# EAGLE board large_sense_pcb_b (EAGLE 9.6.2)
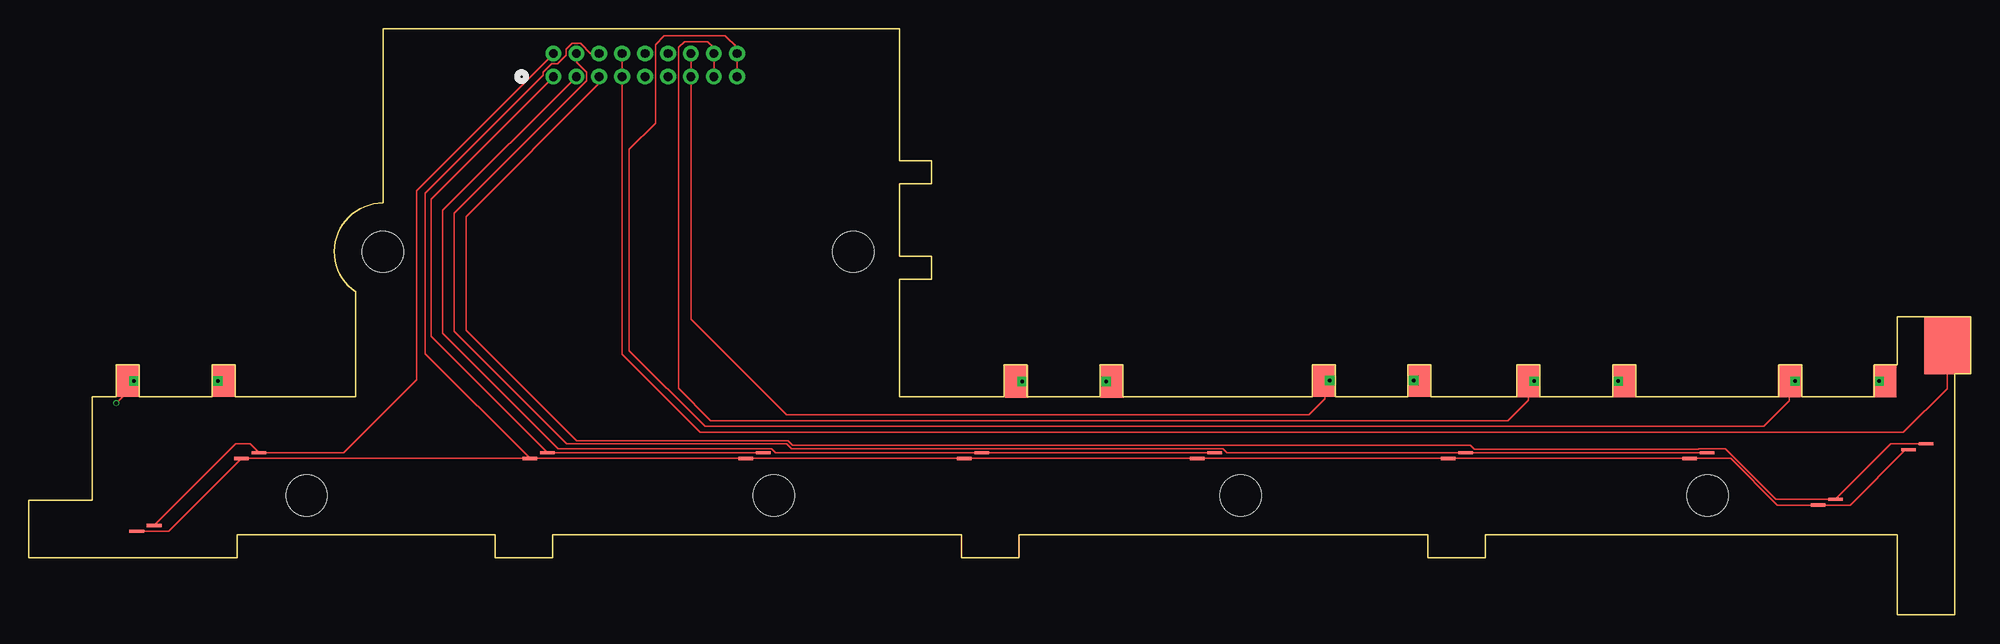
[diagram p0: board, top side]
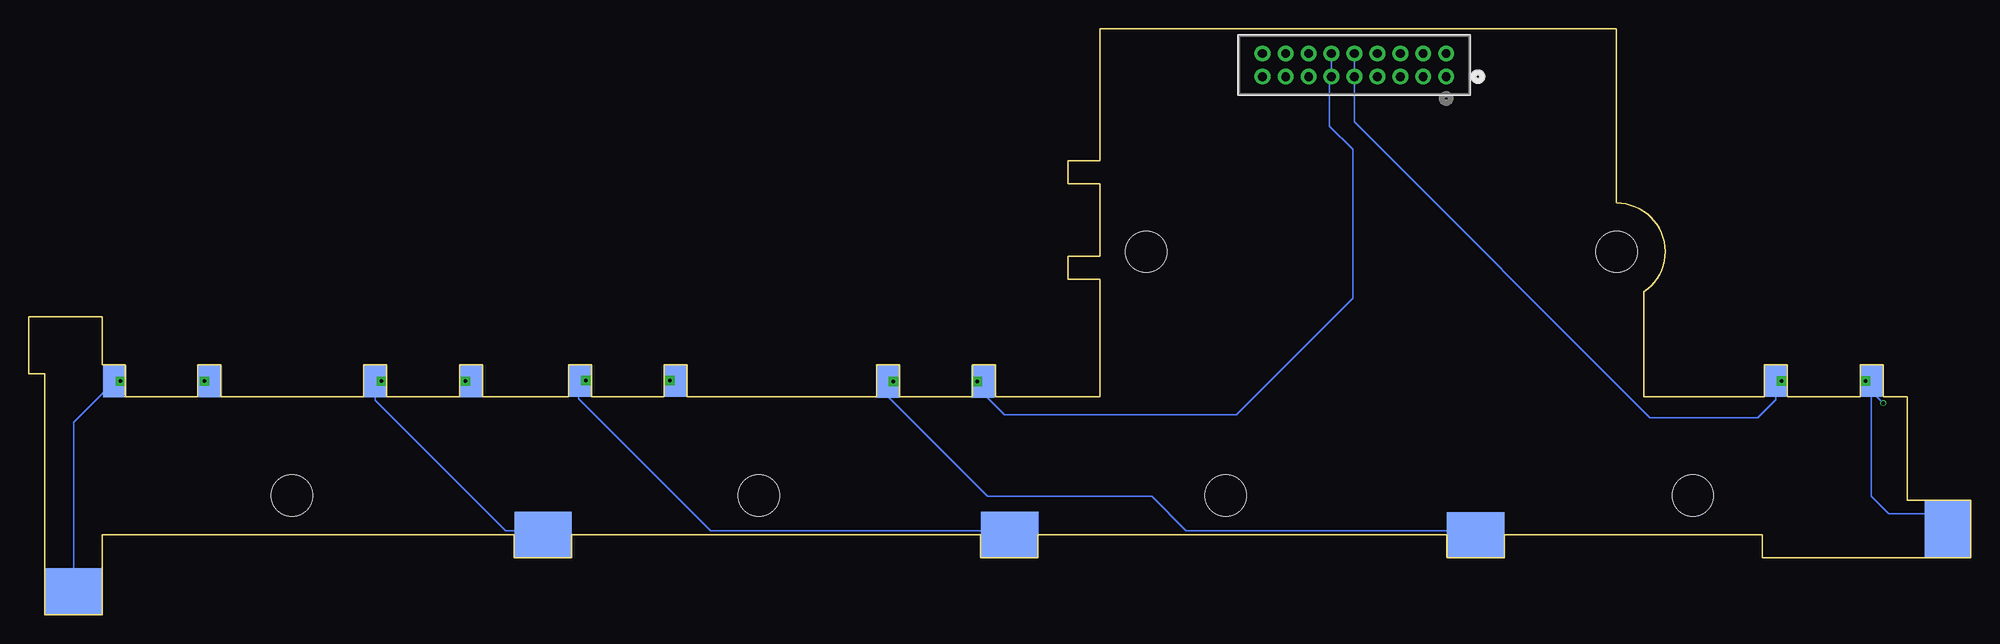
[diagram p1: board, bottom side, seen from below]

Size 169.28 x 51.09 mm. Coordinates in mm from the lower left corner, seen from the top.
Outline: 152.53,21.8 152.53,19 140.07,19 140.07,21.8 138.07,21.8 138.07,19 131.72,19 131.72,21.8 129.72,21.8 129.72,19 122.22,19 122.22,21.8 120.22,21.8 120.22,19 113.87,19 113.87,21.8 111.87,21.8 111.87,19 95.37,19 95.37,21.8 93.37,21.8 93.37,19 87.02,19 87.02,21.8 85.02,21.8 85.02,19 75.88,19 75.88,29.24 78.68,29.24 78.68,31.24 75.88,31.24 75.88,37.59 78.68,37.59 78.68,39.59 75.88,39.59 75.88,51.09 30.88,51.09 30.88,35.9 arc145 28.46,28.15 28.46,19 17.96,19 17.96,21.8 15.96,21.8 15.96,19 9.61,19 9.61,21.8 7.61,21.8 7.61,19 5.5,19 5.5,10 0,10 0,5 18.15,5 18.15,7 40.65,7 40.65,5 45.65,5 45.65,7 81.3,7 81.3,5 86.3,5 86.3,7 121.95,7 121.95,5 126.95,5 126.95,7 162.88,7 162.88,0 167.88,0 167.88,21 169.28,21 169.28,26 162.88,26 162.88,21.8 160.88,21.8 160.88,19 154.53,19 154.53,21.8 152.53,21.8
Copper layers (1*16): Top 0.035mm / dielectric 1.6mm / Bottom 0.035mm
Design rules "jlcpcb-2layers": minimum track width 5mil, minimum drill 0.3mm, track to track 5mil, track to pad 5mil, pad to pad 5mil, via to via 5mil, smd to smd 5mil, copper to edge 0.2mm, drill to drill 6mil, minimum pad ring 10mil, minimum via ring 3mil, stop-mask expansion 4mil, vias tented up to drill 0mil, thermal gap 10mil
Holes 3.6 mm at 24.21,10.4 105.62,10.4 30.88,31.65 146.32,10.4 64.92,10.4 71.88,31.65

## Footprints (pad centres in the part's own frame; a part is rotated, then mirrored left to right if it is on the bottom)
CON18_2X9_UF_DF11_HIR = drill 0.762 pad 1.27: 1 0,0; 2 0,2.007; 3 -2.007,0; 4 -2.007,2.007; 5 -3.988,0; 6 -3.988,2.007; 7 -5.994,0; 8 -5.994,2.007; 9 -8.001,0; 10 -8.001,2.007; 11 -10.008,0; 12 -10.008,2.007; 13 -11.989,0; 14 -11.989,2.007; 15 -13.995,0; 16 -13.995,2.007; 17 -16.002,0; 18 -16.002,2.007
FUSE_PADS = smd 2.8 x 2 bottom: P$1 0,0; P$2 0,8.35 | smd 2.8 x 2: P$3 0,0; P$4 0,8.35 | drill 0.305 square: P$5 0,0.508; P$6 0,7.842
BB_CONTACT = smd 5 x 4: P$1 0,0
THERM_PIN = smd 0.279 x 1.27: P$1 0,0

## Placement (x,y rotation side)
J1  DF11-18DP-2DSA(24)  [CON18_2X9_UF_DF11_HIR]  45.72,46.91 0 bottom
U$1  FUSE  [FUSE_PADS]  16.99,20.39 90 top
U$2  FUSE  [FUSE_PADS]  86.08,20.34 270 top
U$3  FUSE  [FUSE_PADS]  112.88,20.42 270 top
U$4  FUSE  [FUSE_PADS]  130.71,20.37 270 top
U$5  FUSE  [FUSE_PADS]  153.44,20.37 270 top
U$6  BB_CONTACT  [BB_CONTACT]  1.98,7.51 90 bottom
U$7  BB_CONTACT  [BB_CONTACT]  43.15,6.96 0 bottom
U$8  BB_CONTACT  [BB_CONTACT]  83.77,6.98 0 bottom
U$9  BB_CONTACT  [BB_CONTACT]  124.43,7.01 0 bottom
U$10  BB_CONTACT  [BB_CONTACT]  165.35,2.05 180 bottom
U$11  BB_CONTACT  [BB_CONTACT]  167.21,23.47 90 top
U$12  THERM_PIN  [THERM_PIN]  144.78,13.64 90 top
U$13  THERM_PIN  [THERM_PIN]  163.83,14.4 90 top
U$14  THERM_PIN  [THERM_PIN]  123.7,13.64 90 top
U$15  THERM_PIN  [THERM_PIN]  101.85,13.64 90 top
U$16  THERM_PIN  [THERM_PIN]  81.53,13.64 270 top
U$17  THERM_PIN  [THERM_PIN]  43.69,13.64 90 top
U$18  THERM_PIN  [THERM_PIN]  62.48,13.64 270 top
U$19  THERM_PIN  [THERM_PIN]  18.54,13.64 90 top
U$20  THERM_PIN  [THERM_PIN]  155.96,9.57 90 top
U$21  THERM_PIN  [THERM_PIN]  9.4,7.29 90 top
U$22  THERM_PIN  [THERM_PIN]  157.48,10.08 90 top
U$23  THERM_PIN  [THERM_PIN]  165.35,14.91 90 top
U$24  THERM_PIN  [THERM_PIN]  125.22,14.14 90 top
U$25  THERM_PIN  [THERM_PIN]  146.3,14.14 90 top
U$26  THERM_PIN  [THERM_PIN]  83.06,14.14 90 top
U$27  THERM_PIN  [THERM_PIN]  103.38,14.14 90 top
U$28  THERM_PIN  [THERM_PIN]  20.07,14.14 90 top
U$29  THERM_PIN  [THERM_PIN]  10.92,7.79 90 top
U$30  THERM_PIN  [THERM_PIN]  64.01,14.14 90 top
U$31  THERM_PIN  [THERM_PIN]  45.21,14.14 90 top

## Library data of the parts
J1 = sense_pcb_components; COPYRIGHT: Copyright (C) 2023 Ultra Librarian. All rights reserved.; MANUFACTURER_PART_NUMBER: DF11-18DP-2DSA(24); MFR_NAME: Hirose
U$1-U$31 = sense_pcb_components

## Nets
N$1: J1.7 J1.8 U$11.P$1
N$2: U$1.P$2 U$1.P$4 U$1.P$6 U$6.P$1
N$3: J1.17 J1.18 U$5.P$1 U$5.P$3 U$5.P$5
N$4: U$2.P$2 U$2.P$4 U$2.P$6 U$7.P$1
N$5: U$5.P$2 U$5.P$4 U$5.P$6 U$10.P$1
N$6: U$3.P$2 U$3.P$4 U$3.P$6 U$8.P$1
N$7: J1.15 J1.16 U$4.P$1 U$4.P$3 U$4.P$5
N$8: U$4.P$2 U$4.P$4 U$4.P$6 U$9.P$1
N$9: J1.13 J1.14 U$3.P$1 U$3.P$3 U$3.P$5
N$10: J1.11 J1.12 U$2.P$1 U$2.P$3 U$2.P$5
N$11: J1.9 J1.10 U$1.P$1 U$1.P$3 U$1.P$5
THERM1: J1.5 U$22.P$1 U$23.P$1
THERM2: J1.4 U$24.P$1 U$25.P$1
THERM3: J1.3 U$26.P$1 U$27.P$1
THERM4: J1.2 U$28.P$1 U$29.P$1
THERM5: J1.1 U$30.P$1 U$31.P$1
THERMGND: J1.6 U$12.P$1 U$13.P$1 U$14.P$1 U$15.P$1 U$16.P$1 U$17.P$1 U$18.P$1 U$19.P$1 U$20.P$1 U$21.P$1

## Tracks (layer width: path | path; a pad name or v marks a point on that pad's centre or on a via)
N$1
  Top 0.152: U$11.P$1 167.21,19.71 163.4,15.9 58.52,15.9 51.71,22.7 J1.7 J1.8
N$2  (via drill 0.35)
  Top 0.152: v7.62,18.46 8.64,19.48 U$1.P$4 8.64,21 9.15,20.49 U$1.P$6
  Bottom 0.152: U$6.P$1 3.28,8.81 7.11,8.81 8.64,10.34 U$1.P$4 8.64,19.48 v7.62,18.46
N$3
  Top 0.152: J1.17 J1.18 61.72,49.45 60.71,50.47 55.37,50.47 54.61,49.7 54.61,42.85 52.32,40.56 52.32,23.03 58.93,16.43 151.22,16.43 153.44,18.65 U$5.P$3 U$5.P$5
  Bottom 0.152: U$5.P$3 U$5.P$5
N$4
  Top 0.152: U$2.P$4 U$2.P$6
  Bottom 0.152: U$7.P$1 45.11,6.96 45.5,7.35 68.39,7.35 71.37,10.33 85.71,10.33 94.43,19.05 U$2.P$4 U$2.P$6
N$5
  Top 0.152: U$5.P$4 U$5.P$6
  Bottom 0.152: U$10.P$1 165.35,16.8 U$5.P$4 U$5.P$6
N$6
  Top 0.152: U$3.P$4 U$3.P$6
  Bottom 0.152: U$8.P$1 85.78,6.98 86.15,7.35 109.83,7.35 121.33,18.85 121.33,20.31 U$3.P$4 U$3.P$6
N$7
  Top 0.152: J1.15 J1.16 59.72,49.42 59.18,49.96 57.15,49.96 56.64,49.45 56.64,19.73 59.44,16.94 128.92,16.94 130.71,18.73 U$4.P$3 U$4.P$5
  Bottom 0.152: U$4.P$3 U$4.P$5
N$8
  Top 0.152: U$4.P$4 U$4.P$6
  Bottom 0.152: U$4.P$6 U$4.P$4 139.06,18.73 127.69,7.35 126.8,7.35 126.46,7.01 U$9.P$1
N$9
  Top 0.152: J1.14 J1.13 57.71,25.78 66.04,17.45 111.58,17.45 112.98,18.85 112.98,20.31 U$3.P$3 U$3.P$5
  Bottom 0.152: U$3.P$3 U$3.P$5
N$10
  Top 0.152: U$2.P$3 U$2.P$5
  Bottom 0.152: J1.12 J1.11 55.88,46.76 55.88,42.59 53.85,40.56 53.85,27.61 64.01,17.45 84.22,17.45 86.08,19.31 U$2.P$3 U$2.P$5
N$11
  Top 0.152: U$1.P$3 U$1.P$5
  Bottom 0.152: J1.10 J1.9 53.72,42.97 27.94,17.19 18.54,17.19 16.99,18.74 U$1.P$3 U$1.P$5
THERM1
  Top 0.152: J1.5 49.71,46.33 38.1,34.72 38.1,24.81 47.73,15.19 66.16,15.19 66.58,14.77 125.66,14.77 126,14.42 145.52,14.42 145.59,14.49 147.88,14.49 152.29,10.08 U$22.P$1 162.31,14.91 U$23.P$1
THERM2
  Top 0.152: J1.4 47.73,48.17 48.62,47.28 48.62,46.54 37.08,35.01 37.08,24.7 46.88,14.91 66.04,14.91 66.46,14.49 104.1,14.49 104.44,14.14 U$24.P$1 U$25.P$1
THERM3
  Top 0.152: J1.3 36.07,35.25 36.07,24.56 41.78,18.84 46.14,14.49 64.73,14.49 65.07,14.14 U$26.P$1 U$27.P$1
THERM4
  Top 0.152: U$29.P$1 18.03,14.91 19.3,14.91 U$28.P$1 27.43,14.14 33.78,20.49 33.78,36.98 J1.2
THERM5
  Top 0.152: U$30.P$1 U$31.P$1 35.05,24.3 35.05,36.24 J1.1
THERMGND
  Top 0.152: U$21.P$1 12.19,7.29 U$19.P$1 U$17.P$1 | U$17.P$1 U$18.P$1 U$16.P$1 U$15.P$1 U$14.P$1 U$12.P$1 148.34,13.64 152.4,9.57 U$20.P$1 158.75,9.57 163.58,14.4 U$13.P$1 | U$17.P$1 34.54,22.78 34.54,36.75 44.83,47.04 44.83,47.28 45.58,48.03 46.09,48.03 46.84,48.78 46.84,49.28 47.36,49.81 48.09,49.81 48.98,48.92 J1.6